# Altium PCB JacdacJoystick 44.PcbDoc
Units mm, origin at the board's own origin, x right, y up, seen from the top; angles counter-clockwise.
Board outline 24.99 x 32.7 mm, 2 copper layers (Top Layer, Bottom Layer), stack 1.525 mm thick; 22 components, 12 nets, 80 pads, 12 vias.
Unrouted connection lines stored in the file: 16.
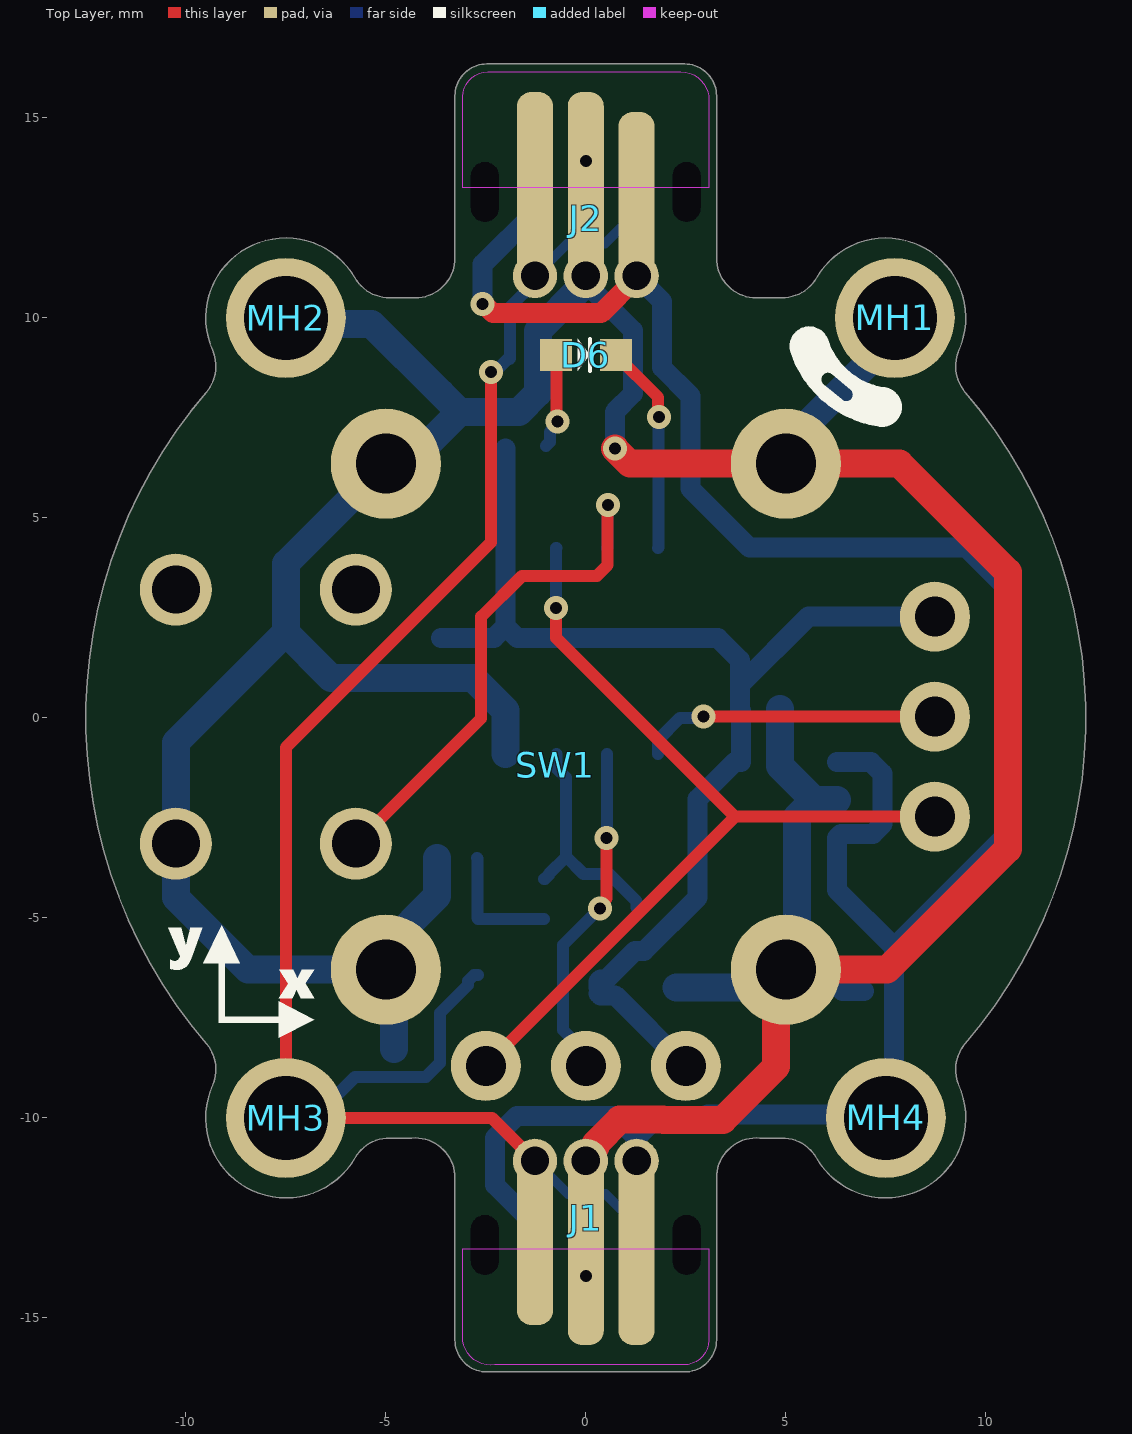
[diagram p0: Top Layer view]
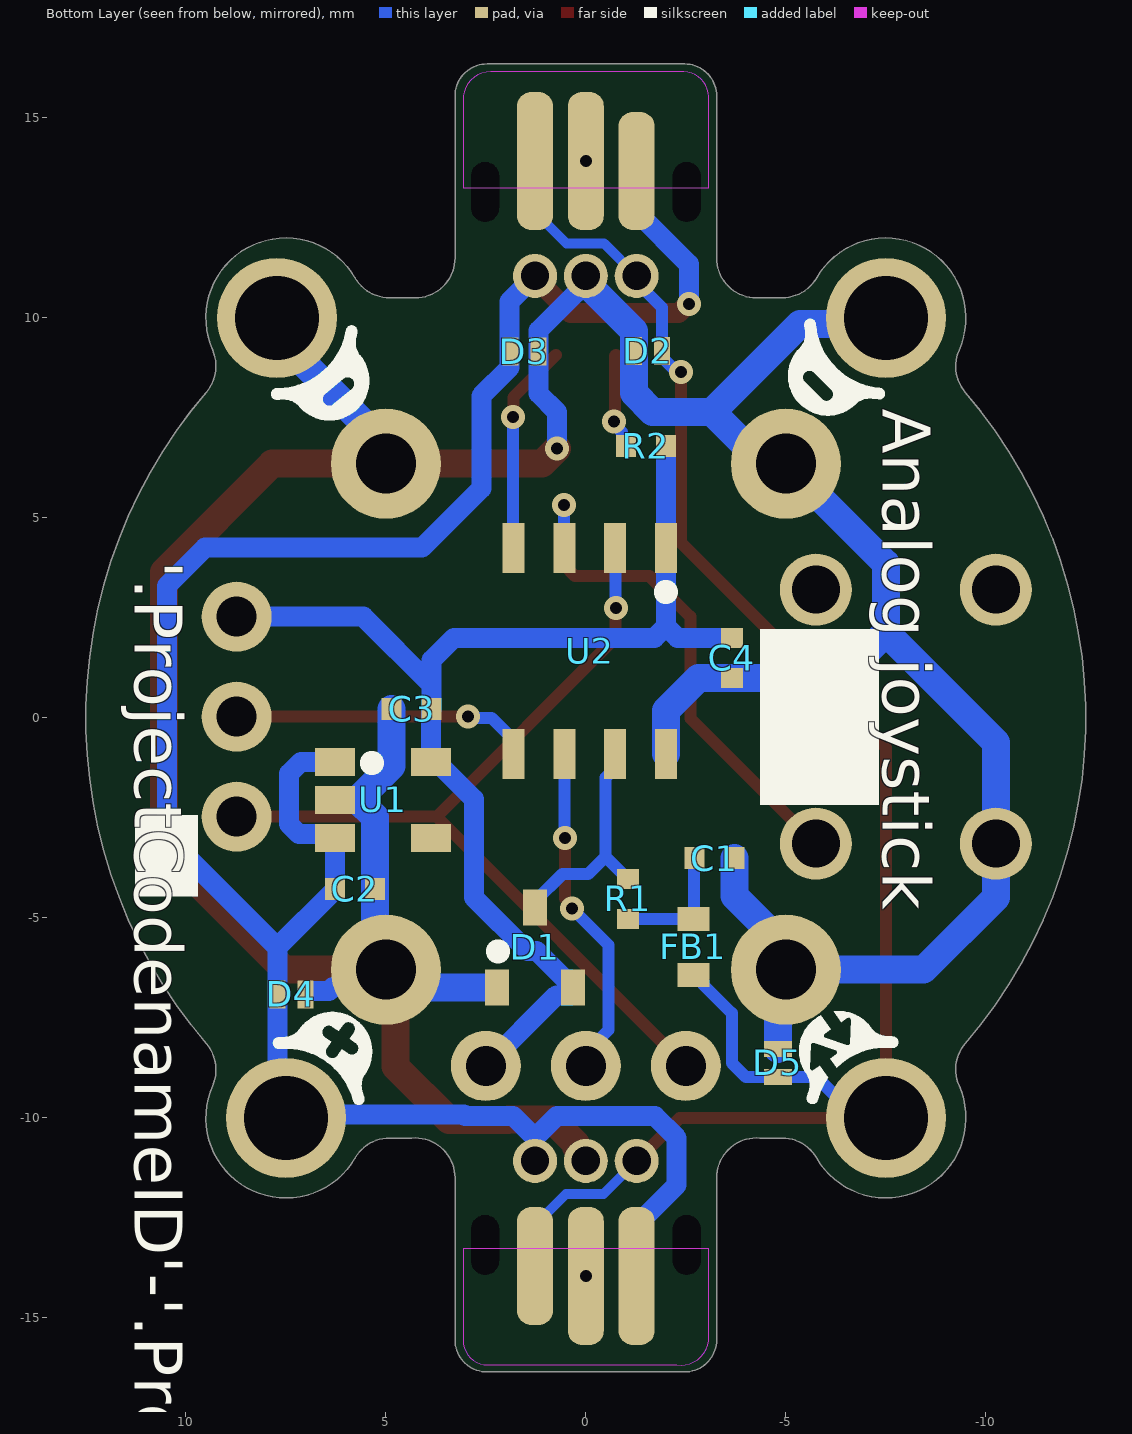
[diagram p1: Bottom Layer view, seen from below]
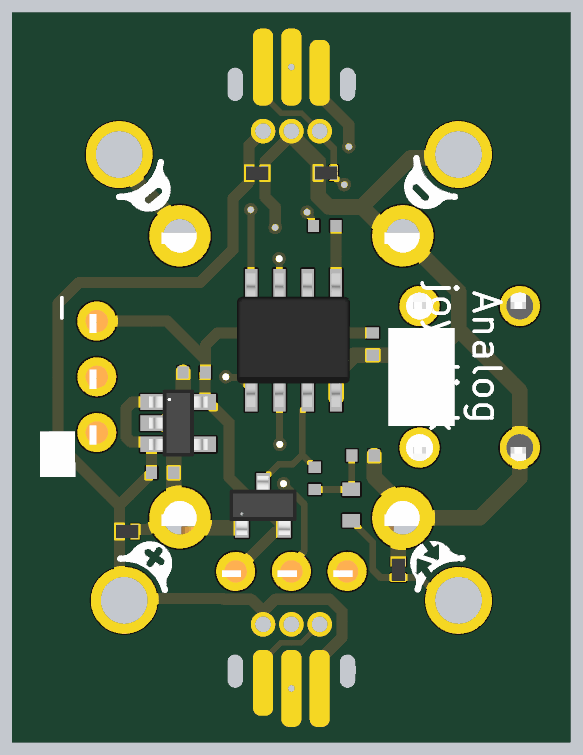
[diagram p2: 3D render of the assembled board from below, using the file's embedded part models]

## Layer stack, top to bottom
Top Solder: solder mask 0.0102, Solder Resist, Dk 3.5
Top Layer: signal copper 0.0356
Dielectric 1: core 1.454, FR-4, Dk 4.2
Bottom Layer: signal copper 0.0356
Bottom Solder: solder mask 0.0102, Solder Resist, Dk 3.5

## Board outline
-9.331,-9.193 ccw(c-7.501,-10) -5.77,-11.002 cw(c-4.905,-11.503) -4.905,-10.503 -4.35,-10.503 cw(c-4.27,-11.5) -3.27,-11.5 -3.27,-15.55 ccw(c-2.471,-15.551) -2.47,-16.35 2.47,-16.35 ccw(c2.471,-15.551) 3.27,-15.55 3.27,-11.5 cw(c4.27,-11.5) 4.35,-10.503 4.904,-10.503 cw(c4.904,-11.503) 5.769,-11.002 ccw(c7.5,-10) 9.331,-9.194 cw(c10.246,-8.791) 9.487,-8.14 ccw(c0.001,0) 9.487,8.14 cw(c10.246,8.792) 9.331,9.194 ccw(c7.5,10) 5.769,11.002 cw(c4.904,11.503) 4.904,10.503 4.35,10.503 cw(c4.27,11.5) 3.27,11.5 3.27,15.55 ccw(c2.471,15.551) 2.47,16.35 -2.47,16.35 ccw(c-2.471,15.551) -3.27,15.55 -3.27,11.5 cw(c-4.27,11.5) -4.35,10.503 -4.904,10.503 cw(c-4.904,11.503) -5.769,11.002 ccw(c-7.5,10) -9.33,9.194 cw(c-10.245,8.79) -9.486,8.139 ccw(c0.001,0) -9.487,-8.138 cw(c-10.246,-8.789)

## Design rules (kind name [scope] priority, off if disabled: settings)
AssemblyTestPointUsage [All] p1: valid=2
BoardOutlineClearance [All] p1: gap=0.3 ignorepadtopadclearanceinfootprint=FALSE except(0: Arc-SplitContinuation Track-SplitContinuation SMDPad-SplitContinuation THPad-SplitContinuation Via-SplitContinuation Fill-SplitContinuation Poly-SplitContinuation Region-OutlineEdge Region-SplitContinuation Text-OutlineEdge Text-SplitContinuation; 0.25: THPad-OutlineEdge Poly-OutlineEdge)
Clearance [All] p1: gap=0.125 ignorepadtopadclearanceinfootprint=FALSE except(0: Arc-Hole Track-Hole SMDPad-Hole THPad-Hole Via-Hole Fill-Hole Poly-Hole Region-Hole Text-Hole; 0.2: Arc-Arc Arc-Track Arc-Via Arc-Fill Arc-Poly Arc-Region Arc-Text Track-Track Track-Via Track-Fill Track-Poly Track-Region Track-Text)
ComponentClearance SpecialComponentClearance [InComponent('MH1') or InComponent('MH2')  or InComponent('MH3')  or InComponent('MH4') vs InComponent('J3') or InComponent('J4')  or InComponent('J6')  or InComponent('J7') or InComponent('J2') or InComponent('MH2') or InComponent('J1')] p1: gap=0 collisioncheckmode=3 verticalgap=0 showdistances=FALSE
ComponentClearance [All] p2: gap=0.2 collisioncheckmode=3 verticalgap=0.2 showdistances=FALSE
DiffPairsRouting [All] p1: maxlimit=2 minlimit=0.15 mostfreqgap=0.15 toplayer_minwidth=0.15 toplayer_maxwidth=2 toplayer_prefwidth=0.15 bottomlayer_minwidth=0.15 bottomlayer_maxwidth=2 bottomlayer_prefwidth=0.15 substack1={CB9D278B-8BF5-444A-AAF4-837A2A9DF42D} toplayer_{cb9d278b-8bf5-444a-aaf4-837a2a9df42d}_minwidth=0.381 toplayer_{cb9d278b-8bf5-444a-aaf4-837a2a9df42d}_maxwidth=0.381 toplayer_{cb9d278b-8bf5-444a-aaf4-837a2a9df42d}_prefwidth=0.381 bottomlayer_{cb9d278b-8bf5-444a-aaf4-837a2a9df42d}_minwidth=0.381 bottomlayer_{cb9d278b-8bf5-444a-aaf4-837a2a9df42d}_maxwidth=0.381 bottomlayer_{cb9d278b-8bf5-444a-aaf4-837a2a9df42d}_prefwidth=0.381 substack2={826B8647-A721-4255-895A-19F9591B9CD1} toplayer_{826b8647-a721-4255-895a-19f9591b9cd1}_minwidth=0.381 toplayer_{826b8647-a721-4255-895a-19f9591b9cd1}_maxwidth=0.381 toplayer_{826b8647-a721-4255-895a-19f9591b9cd1}_prefwidth=0.381 bottomlayer_{826b8647-a721-4255-895a-19f9591b9cd1}_minwidth=0.381 bottomlayer_{826b8647-a721-4255-895a-19f9591b9cd1}_maxwidth=0.381 bottomlayer_{826b8647-a721-4255-895a-19f9591b9cd1}_prefwidth=0.381 substack3={E64FCAF4-1BC8-437D-B1E0-0E5F2DC0F59E} toplayer_{e64fcaf4-1bc8-437d-b1e0-0e5f2dc0f59e}_minwidth=0.381 toplayer_{e64fcaf4-1bc8-437d-b1e0-0e5f2dc0f59e}_maxwidth=0.381 toplayer_{e64fcaf4-1bc8-437d-b1e0-0e5f2dc0f59e}_prefwidth=0.381 bottomlayer_{e64fcaf4-1bc8-437d-b1e0-0e5f2dc0f59e}_minwidth=0.381 bottomlayer_{e64fcaf4-1bc8-437d-b1e0-0e5f2dc0f59e}_maxwidth=0.381 bottomlayer_{e64fcaf4-1bc8-437d-b1e0-0e5f2dc0f59e}_prefwidth=0.381 substack4={E61CE66C-507C-4E1E-8E83-C905434AFC1C} toplayer_{e61ce66c-507c-4e1e-8e83-c905434afc1c}_minwidth=0.381 toplayer_{e61ce66c-507c-4e1e-8e83-c905434afc1c}_maxwidth=0.381 toplayer_{e61ce66c-507c-4e1e-8e83-c905434afc1c}_prefwidth=0.381 bottomlayer_{e61ce66c-507c-4e1e-8e83-c905434afc1c}_minwidth=0.381 bottomlayer_{e61ce66c-507c-4e1e-8e83-c905434afc1c}_maxwidth=0.381 bottomlayer_{e61ce66c-507c-4e1e-8e83-c905434afc1c}_prefwidth=0.381 maxuncoupledlength=25
FabricationTestPointUsage [All] p1: valid=2 allowmultiple=FALSE
HoleSize [All] p1: absolutevalues=TRUE maxlimit=2.54 minlimit=0.2 maxpercent=80.000 minpercent=20.000
MinimumSolderMaskSliver [All] p1: minsoldermaskwidth=0.005
PlaneClearance [All] p1: clearance=0.3
PlaneConnect [All] p1: planeconnectstyle=Relief reliefexpansion=0.5 reliefentries=4 reliefconductorwidth=0.2 reliefairgap=0.3
PolygonConnect "PolygonConnect GND" [isVIA] p1: connectstyle=Relief reliefconductorwidth=0.2 reliefentries=4 polygonreliefangle="90 Angle" airgapwidth=0.2
PolygonConnect [All] p2: connectstyle=Relief reliefconductorwidth=0.2 reliefentries=4 polygonreliefangle="90 Angle" airgapwidth=0.2
RoutingVias [All] p1: holewidth=0.3 width=0.6 viastyle="Through Hole" minholewidth=0.3 minwidth=0.6 maxholewidth=0.3 maxwidth=0.8
SilkToSilkClearance [All] p1: silktosilkclearance=0.001
SilkToSolderMaskClearance [IsPad] p1: minsilkscreentomaskgap=0.05 clearancetoexposedcopper=TRUE
SolderMaskExpansion [All] p1: expansion=0.075 istentingtop=FALSE
Width [All] p1: maxlimit=2 minlimit=0.15 preferedwidth=0.15 substack1={CB9D278B-8BF5-444A-AAF4-837A2A9DF42D} substack2={826B8647-A721-4255-895A-19F9591B9CD1} substack3={E64FCAF4-1BC8-437D-B1E0-0E5F2DC0F59E} substack4={E61CE66C-507C-4E1E-8E83-C905434AFC1C} minimp=50.000000 maximp=50.000000 favimp=50.000000
20 further rules are at their usual default settings.

## Components (designator, comment, footprint, x,y, rotation, side; value= is the part's Value field where it differs from the comment)
C1 "CL05C330JB5NNNC" "C0402_0.55MM - without outline" -3.216,-3.503 r0 bottom
C2 "CL05A105KP5NNNC" "C0402_0.55MM - without outline" 5.775,-4.275 r0 bottom
C3 "CL05A105KP5NNNC" "C0402_0.55MM - without outline" 4.356,0.226 r180 bottom
C4 "CL05A105KP5NNNC" "C0402_0.55MM - without outline" -3.65,1.5 r90 bottom
D1 "BAT54S" "NXP-BAT54S-TO-236AB - WITHOUT OUTLINE" 1.27,-5.736 r90 bottom
D2 "RCLAMP0521P-N" "TVS 0402 - L" -1.55,9.175 r0 bottom
D3 "RCLAMP0521P-N" "TVS 0402 - L" 1.534,9.164 r180 bottom
D4 "RCLAMP0521P-N" "TVS 0402 - L" 7.361,-6.911 r180 bottom
D5 "RCLAMP0521P-N" "TVS 0402 - L" -4.8,-8.625 r90 bottom
D6 "Everlight Elec'''" "0603 Orange" 0,9.075 r180 top
FB1 "TDK MPZ1608S102ATA00" "TDK MPZ1608 0.8MM - WITHOUT OUTLINE" -2.689,-5.721 r90 bottom
J1 "3 pin JACDAC edge connector" JACDAC_EDGE_CONNECTOR_NO_TRACES 0,-10.525 r180 top
J2 "3 pin JACDAC edge connector" JACDAC_EDGE_CONNECTOR_NO_TRACES 0,10.5 r0 top
MH1 "MH_5.0MMK_3.0MMC_2.1MMD_PTH" MH_5.0MMK_3.0MMC_2.1MMD_PTH 7.725,10 r180 top
MH2 "MH_5.0MMK_3.0MMC_2.1MMD_PTH" MH_5.0MMK_3.0MMC_2.1MMD_PTH -7.5,10 r90 top
MH3 "MH_5.0MMK_3.0MMC_2.1MMD_PTH" MH_5.0MMK_3.0MMC_2.1MMD_PTH -7.5,-10 r180 top
MH4 "MH_5.0MMK_3.0MMC_2.1MMD_PTH" MH_5.0MMK_3.0MMC_2.1MMD_PTH 7.5,-10 r0 top
R1 "RC0402FR-07220RL" "R0402 - Without outline" -1.05,-4.525 r270 bottom
R2 "RC0402FR-071KL" "R0402 - Without outline" -1.5,6.8 r180 bottom
SW1 "THB001P" THB001P 0,0.03 r270 top
U1 "ME6211C33M5G-N" MICRONE-SOT23-5 5.075,-2.05 r180 bottom
U2 "PMS171B-S08" SOP-8 -0.1,1.675 r270 bottom

## Footprints (in the part's own frame and the unit in brackets; to place one, negate y for a bottom-side part, rotate by r counter-clockwise, add the part's x,y. Pads: shape width x height; smd on the part's side, far side on the other; paste and mask are expansions set on the pad)
"0603 Orange" [mm]
  rect 0.8x0.8 smd paste-0.05: 1(-0.75,0) 2(0.75,0)
  silkscreen extent -0.1,-0.4 0.2,0.4, body extent -0.79,-0.4 0.81,0.4, height 0.4
"C0402_0.55MM - without outline" [mm]
  rect 0.5x0.55 smd: 1(-0.5,0) 2(0.5,0)
  body extent -0.5,-0.25 0.5,0.25, height 0.55
JACDAC_EDGE_CONNECTOR_NO_TRACES [mm] "JacDac 3 pin connector with no traces"
  rrect78% 0.9x2.95 smd far side paste-1 mask+0: 1(-1.27,3.175)
  rrect78% 0.9x4.3 smd paste-1 mask+0: 1(1.27,2.5)
  round 1.11 / inner round 0.71 / far side round 1.1 hole 0.71 paste-0.254 mask+0: 1(1.27,0.55) 2(0,0.55) 3(-1.27,0.55)
  rrect78% 0.9x3.45 smd far side paste-1 mask+0: 2(0,3.425) 3(1.27,3.425)
  rrect78% 0.9x4.8 smd paste-1 mask+0: 2(0,2.75) 3(-1.27,2.75)
  round 0 hole 0.7 slot 1.5 at 90 deg unplated: ""(-2.52,2.65) ""(2.52,2.65)
  Top Layer keep-out region: -3.075,2.75 -3.07,5.033 -2.987,5.341 -2.761,5.567 -2.453,5.65 -2.453,5.65 2.27,5.65 2.545,5.635 2.794,5.516 2.978,5.31 3.07,5.05 3.07,5.05 3.07,2.75
  Bottom Layer lines w0.2: -1.126,0.85 -1.27,0.85
  Bottom Layer keep-out region: -3.07,2.75 -3.07,5.033 -3.023,5.269 -2.889,5.469 -2.689,5.603 -2.453,5.65 -2.453,5.65 2.27,5.65 2.545,5.635 2.794,5.516 2.978,5.31 3.07,5.05 3.07,5.05 3.07,2.75
MH_5.0MMK_3.0MMC_2.1MMD_PTH [mm] "Mounting Hole 5.0mm clearance, 3.1 annualar ring and 2.1mm PTH"
  round 3 hole 2.1 mask+0.05: 1(0,0)
MICRONE-SOT23-5 [mm]
  rect 1x0.7 smd: 1(-1.2,0.95) 2(-1.2,0) 3(-1.2,-0.95) 4(1.2,-0.95) 5(1.2,0.95)
  silkscreen extent -0.33,0.88 -0.23,0.97, body extent -1.32,-1.5 1.32,1.5, height 1.11
"NXP-BAT54S-TO-236AB - WITHOUT OUTLINE" [mm] "SOT23, 3-Leads, Body 2.90x2.30mm, Pitch 0.95mm, IPC Medium Density"
  rect 0.9x0.6 smd: 1(-1,0.95) 2(-1,-0.95) 3(1,0)
  silkscreen extent -0.15,0.88 -0.05,0.97, body extent -1.32,-1.5 1.32,1.5, height 1.12
"R0402 - Without outline" [mm]
  rect 0.5x0.55 smd: 1(-0.5,0) 2(0.5,0)
  body extent -0.5,-0.25 0.5,0.25, height 0.35
SOP-8 [mm] "Pitch:1.27mm,Width:150mil"
  rect 1.25x0.55 smd: 1(-2.575,1.905) 2(-2.575,0.635) 3(-2.575,-0.635) 4(-2.575,-1.905) 5(2.575,-1.905) 6(2.575,-0.635) 7(2.575,0.635) 8(2.575,1.905)
  silkscreen extent -1.52,1.85 -1.43,1.95, body extent -3,-2.55 3,2.54, height 1.3
"TDK MPZ1608 0.8MM - WITHOUT OUTLINE" [mm]
  rect 0.6x0.8 smd: 1(-0.7,0) 2(0.7,0)
  body extent -0.8,-0.4 0.8,0.4, height 0.8
THB001P [mm] "Plugin Multi-Directional Switches"
  round 1.75 hole 1: 1(8.73,-2.5) 2(8.73,0) 3(8.73,2.5) 4(2.5,8.73) 5(0,8.73) 6(-2.5,8.73)
  round 1.8 hole 1.2: 7(-3.175,-5.75) 8(-3.175,-10.25) 9(3.175,-5.75) 10(3.175,-10.25)
  round 2.75 hole 1.5: 11(-6.325,5) 11(-6.325,-5) 11(6.325,5) 11(6.325,-5)
  body extent -6.47,-11.43 9.92,10.03, height 17.3
"TVS 0402 - L" [mm] "TVS 0402 RoHS"
  rect 0.4x0.7 smd paste-0.038 mask+0.05: 1(-0.35,0) 2(0.35,0)
  body extent -0.5,-0.3 0.5,0.3, height 0.5

## Part data
C1: "CAP CER 33PF 50V C0G/NP0 0402", Capacitance=33pF, Case Code (Imperial)=0402, Case Code (Metric)=1005, Dielectric=C0G, Manufacturer=Samsung, Max Operating Temperature=125°C, Min Operating Temperature=-55°C, Package Quantity=1, Supplier Part Number 1=1276-1272-1-ND, Temperature Coefficient=300ppm/°C, Tolerance=5%, Voltage=50V, Case/Package=0402, Category="Ceramic Capacitors", ComponentLink1Description="Online datasheet", ComponentLink1URL=https://datasheet.ciiva.com/15195/getdatasheetpartid-355282-15195687.pdf, Construction=Flat, Contact Plating=Tin, Depth=0.5mm, Height=0.5mm, Lead Free="Lead Free", Length=1mm, Manufacturer Part Number=CL05C330JB5NNNC, Material=Ceramic, Mount="Surface Mount", Packaging="Tape and Reel", Pricing 1="1=0.10000, 10=0.02300, 50=0.01260, 100=0.01040, 500=0.00740, 1000=0.00582, 2500=0.00529, 5000=0.00487 (USD)", Pricing 2="1=0.12500, 25=0.02900, 100=0.01300, 250=0.01100, 500=0.00900, 1000=0.00600 (USD)", Pricing 3="1=0.10000, 10=0.01400, 50=0.01400, 100=0.01100, 1000=0.00600, 10000=0.00400 (USD)", Pricing 4="150=0.01120, 500=0.00860, 2500=0.00640, 5000=0.00550 (GBP)", Radiation Hardening=No, RoHS=Yes, RoHS Compliant=Yes, Series=CL, Stock 1=5436088, Stock 2=45340, Stock 3=8877, Stock 4=10934, Supplier 1=Digi-Key, Supplier 2=Newark, Supplier 3=Mouser, Supplier 4=Farnell, Supplier Part Number 2=82AC9259, Supplier Part Number 3=187-CL05C330JB5NNNC, Supplier Part Number 4=3013373RL, Thickness=0.022inch, Voltage Rating=50V, Voltage Rating (DC)=50V, Width=0.02inch
C2 C3 C4: "CAP CER 1UF 10V X5R 0402", Capacitance=1µF, Case Code (Imperial)=0402, Case Code (Metric)=1005, Dielectric=X5R, Manufacturer=Samsung, Max Operating Temperature=85°C, Min Operating Temperature=-55°C, Package Quantity=1, Supplier Part Number 1=1276-1076-1-ND, Tolerance=10%, Voltage Rating=10V, Case/Package=0402, Category=Capacitors, Checked=?, ComponentLink1Description="Online datasheet", ComponentLink1URL=https://datasheet.ciiva.com/15195/getdatasheetpartid-358390-15195630.pdf, Contact Plating=Tin, Created=DG, Depth=0.5mm, Height=0.5mm, Length=1mm, Manufacturer Part Number=CL05A105KP5NNNC, Material=Ceramic, Mount="Surface Mount", Packaging="Tape and Reel", Pricing 1="1=0.10000, 10=0.03900, 50=0.02100, 100=0.01720, 500=0.01228, 1000=0.00965, 2500=0.00877, 5000=0.00807 (USD)", Pricing 2="1=0.10000, 10=0.04200, 100=0.01800, 500=0.01300, 1000=0.01000, 2500=0.00900 (USD)", Pricing 3="10=0.02450, 100=0.02000, 500=0.01310, 2500=0.00920, 5000=0.00810, 10000=0.00640, 50000=0.00490 (GBP)", Radiation Hardening=No, RoHS=Yes, Stock 1=5705569, Stock 2=928941, Stock 3=53670, Supplier 1=Digi-Key, Supplier 2=Mouser, Supplier 3=Farnell, Supplier Part Number 2=187-CL05A105KP5NNNC, Supplier Part Number 3=3013329, Thickness=0.022inch, Width=0.02inch
D1: "DIODE ARRAY SCHOTTKY 30V SOT23", Manufacturer=Nexperia, Manufacturer Part Number=BAT54S,235, Supplier Part Number 1=1727-1868-1-ND, Category="Rectifier Diodes", ComponentLink1Description="NXP datasheet online", ComponentLink1URL=https://assets.nexperia.com/documents/data-sheet/BAT54_SER.pdf, Pricing 1="1=0.13000, 10=0.11900, 100=0.05610, 500=0.03326, 1000=0.02185, 5000=0.02138 (USD)", RoHS=No, Stock 1=14011, Supplier 1=Digi-Key, Supplier 2=Mouser, Supplier 3=RSComponents, Supplier Part Number 2=771-BAT54S235, Supplier Part Number 3=1707990
D2 D3 D4 D5: "Bidirectional 5V (Max) 6V 16V 3.5A (8/20us) 0402 TVS RoHS", Manufacturer="Born Semiconductor", Package=0402, Supplier1 Part Number=C316043, Checked By=?, ComponentLink1Description="Online datasheet", ComponentLink1URL=https://datasheet.lcsc.com/szlcsc/Bourne-Semicon-Shenzhen-RCLAMP0521P-N_C316043.pdf, Created By="D Gakure", Manufacturer Part Number=RCLAMP0521P-N, Supplier1=LCSC
D6: library part 19-217/S2C-AQ1R1B/3T, "LED ORANGE DIFFUSED 0603 SMD", Case Code (Imperial)=0603, Color=Orange, Manufacturer="Everlight Elec", Supplier 1 Part Number=C146215, Case/Package=0603, Colour=Orange, ComponentLink1Description="Online datasheet", ComponentLink1URL=https://datasheet.lcsc.com/lcsc/1912171731_Everlight-Elec-19-217-S2C-AQ1R1B-3T_C146215.pdf, Manufacturer Part Number=19-217/S2C-AQ1R1B/3T, Mount="Surface Mount", Supplier 1=LCSC
FB1: "0603 1k@100MHz 0.8A chip", Case Code (Imperial)=0603, Case Code (Metric)=1608, Current Rating=800mA, DC Resistance (DCR)=300mR, Manufacturer=TDK, Manufacturer Part Number=MPZ1608S102ATA00, Package Quantity=4000, Supplier Part Number 1=445-8694-1-ND, Tolerance=25%, Case/Package=0603, ComponentLink2Description="datasheet online", ComponentLink2URL=https://www.mouser.co.uk/datasheet/2/400/eads_commercial_power_mpz1608_en-923650.pdf, ComponentLink3Description=datasheet, ComponentLink3URL="Y:\System\Altium\Libraries 2014\TDK\Datasheets\eads_commercial_power_mpz1608_en-923650.pdf", Core Material=Ferrite, Height=0.037inch, Impedance="1kR @ 100MHz", Length=0.063inch, Max DC Current=800mA, Mount="Surface Mount", Packaging="Tape and Reel", Pricing 1="1=0.1, 10=0.079, 25=0.0716, 50=0.0644, 100=0.0472, 250=0.03432, 500=0.03146, 1000=0.02717 (USD)", Stock 1=113542, Supplier 1=Digi-Key, Supplier 2=Mouser, Supplier Part Number 2=810-MPZ1608S102ATA00, Width=0.031inch
J1 J2: library part "Jacdac edge connector", "3 pin Jacdac edge connector 1.27mm pitch", Manufacturer Part Number=JACDAC_EDGE_CONNECTOR, Checked By=?, ComponentLink1Description="Yuliang JACDAC cable connector drawing online", ComponentLink1URL=https://github.com/microsoft/jacdac-mdk/blob/main/connector/JACDAC-Connector-by-Yuliang-2020-11-28.pdf, ComponentLink2Description="JACDAC PCB edge connector spec onlin", ComponentLink2URL=https://github.com/microsoft/jacdac-mdk/blob/main/connector/JACDAC_PCB_Edge_Connector_Drawing_JD-PEC-01_rev_01.pdf, Created By="D. Gakure", PCB Type="1.6mm FR4"
MH1 MH2 MH3 MH4: "Mounting Hole 5.0mm keepout, 3.0mm annualar ring and 2.1mm Drill PTH"
R1: "RES SMD 220 OHM 1% 1/16W 0402", Case Code (Imperial)=0402, Case Code (Metric)=1005, Manufacturer=Yageo, Max Operating Temperature=155°C, Max Power Dissipation=63mW, Min Operating Temperature=-55°C, Package Quantity=1, Power Rating=62.5mW, Resistance=220R, Resistor Type="Thick Film", Supplier Part Number 1=311-220LRCT-ND, Temperature Coefficient=100ppm/°C, Tolerance=1%, Voltage Rating=50V, Case/Package=0402, Category=Resistors, Checked=?, ComponentLink1Description=https://datasheet.ciiva.com/11819/0900766b80c66297-11819466.pdf?src-supplier=RSComponents, ComponentLink1URL=https://datasheet.ciiva.com/11819/0900766b80c66297-11819466.pdf?src-supplier=RSComponents, ComponentLink2Description=https://datasheet.ciiva.com/2453/pyu-r-int-thick-7-2453460.pdf?src-supplier=Digi-Key, ComponentLink2URL=https://datasheet.ciiva.com/2453/pyu-r-int-thick-7-2453460.pdf?src-supplier=Digi-Key, ComponentLink3Description=https://datasheet.ciiva.com/2453/pyu-r-int-thick-7-2453461.pdf?src-supplier=Digi-Key, ComponentLink3URL=https://datasheet.ciiva.com/2453/pyu-r-int-thick-7-2453461.pdf?src-supplier=Digi-Key, ComponentLink4Description=https://datasheet.ciiva.com/2453/pyu-r-int-thick-7-2453462.pdf?src-supplier=Digi-Key, ComponentLink4URL=https://datasheet.ciiva.com/2453/pyu-r-int-thick-7-2453462.pdf?src-supplier=Digi-Key, ComponentLink5Description=https://datasheet.ciiva.com/16746/pyu-rc0402-51-rohs-l-6-r-16746831.pdf?src-supplier=Future+Electronics, ComponentLink5URL=https://datasheet.ciiva.com/16746/pyu-rc0402-51-rohs-l-6-r-16746831.pdf?src-supplier=Future+Electronics, Created=D.G, Depth=0.5mm, Features="Moisture Resistant", Height=0.016inch, Lead Free="Lead Free", Length=1mm, Manufacturer Part Number=RC0402FR-07220RL, Military Standard=Not, Number of Pins=2, Number of Terminations=2, Packaging="Tape and Reel", Pricing 1="1=0.10000, 10=0.01400, 100=0.00580, 1000=0.00262, 2500=0.00228, 5000=0.00188 (USD)", Pricing 2="1=0.10000, 10=0.01200, 100=0.00400, 1000=0.00400, 2500=0.00400, 10000=0.00300 (USD)", Pricing 3="1=0.08130, 25=0.01210, 100=0.01120, 250=0.01030, 500=0.00900 (GBP)", REACH SVHC="No SVHC", RoHS=Yes, Stock 1=1286042, Stock 2=324625, Stock 3=18234, Supplier 1=Digi-Key, Supplier 2=Mouser, Supplier 3=Farnell, Supplier Part Number 2=603-RC0402FR-07220RL, Supplier Part Number 3=2147864, Termination=SMD/SMT, Voltage Rating (DC)=50V, Width=0.02inch
R2: "RES SMD 1K OHM 1% 1/16W 0402", Case Code (Imperial)=0402, Case Code (Metric)=1005, Manufacturer=Yageo, Max Operating Temperature=155°C, Min Operating Temperature=-55°C, Power Rating=62.5mW, Resistance=1kR, Resistor Type="Thick Film", Supplier Part Number 1=311-1.00KLRDKR-ND, Temperature Coefficient=100ppm/°C, Tolerance=1%, Voltage Rating=50V, Case/Package=0402, Category=Resistors, Checked=?, ComponentLink2Description="Online datasheet", ComponentLink2URL=https://datasheet.ciiva.com/12666/pyu-rc0402-51-rohs-l-6-r-12666741.pdf, Created=D.G, Depth=0.5mm, Height=0.32mm, Lead Free="Lead Free", Length=1mm, Manufacturer Part Number=RC0402FR-071KL, Military Standard=Not, Number of Pins=2, Packaging="Tape and Reel", Pricing 1="1=0.10000, 10=0.01400, 100=0.00580, 1000=0.00262, 2500=0.00228, 5000=0.00188 (USD)", Pricing 2="1=0.10000, 10=0.01200, 100=0.00400, 1000=0.00400, 2500=0.00400, 10000=0.00300 (USD)", Pricing 3="1=0.08130, 25=0.01210, 100=0.01120, 250=0.01030, 500=0.00900 (GBP)", REACH SVHC=Unknown, RoHS=Yes, Stock 1=37591306, Stock 2=11912978, Stock 3=29900, Supplier 1=Digi-Key, Supplier 2=Mouser, Supplier 3=Farnell, Supplier Part Number 2=603-RC0402FR-071KL, Supplier Part Number 3=2132441, Termination=SMD/SMT, Voltage Rating (DC)=50V, Width=0.5mm
SW1: "Joystick, 2 - Axis Analog (Resistive) Output", Manufacturer="ITT C&K", Supplier Part Number 1=108-THB001P-ND, Manufacturer Part Number=THB001P, Pricing 1="1=1.99000, 5=1.94600, 10=1.63700, 25=1.54840, 50=1.45980, 100=1.32710 (USD)", Pricing 2="1=1.42000, 10=1.31000, 25=1.31000, 50=1.31000, 100=1.22000, 250=1.22000 (USD)", Pricing 3="1=1.70000, 10=1.42000, 50=1.27000, 100=1.16000, 1000=1.12000, 10000=1.12000 (USD)", Pricing 4="1=1.50000, 10=1.26000, 25=1.19000, 50=1.12000, 100=1.01000, 250=0.99300 (GBP)", RoHS=No, Stock 1=4242, Stock 2=9015, Stock 3=4075, Stock 4=9034, Supplier 1=Digi-Key, Supplier 2=Newark, Supplier 3=Mouser, Supplier 4=Farnell, Supplier Part Number 2=66AH3097, Supplier Part Number 3=611-THB001P, Supplier Part Number 4=3463017
U1: "6V 260mV @ 200mA(typ) - - Fixed 3.3V SOT-23-5 Linear Voltage Regulators (LDO) ROHS", Case/Package=SOT-23-5, Dropout Voltage=200mV, Manufacturer="MICRONE(Nanjing Micro One Elec)", Max Input Voltage=6, Min Output Voltage=3.3V, Output Current=500mA, Supplier Part Number=C82942, Category="Voltage Regulators - Linear", Checked=?, ComponentLink3Description="On Semi datasheet online", ComponentLink3URL=https://datasheet.lcsc.com/lcsc/1811131510_MICRONE-Nanjing-Micro-One-Elec-ME6211C33M5G-N_C82942.pdf, Created=DG, Manufacturer Part Number=ME6211C33M5G-N, Mount="Surface Mount", Number of Regulators=1, Output Configuration=Positive, Output Type=Fixed, Pricing 1="1=0.33000, 10=0.24900, 25=0.21760, 100=0.12440, 250=0.11664, 500=0.09330, 1000=0.07153 (USD)", Stock 1=32529, Supplier 1=LCSC
U2: "8bit OTP MCU with 8-bit ADC", Manufacturer=PADAUK, Package=SOP-16, Supplier Part Number 1=C337967, ComponentLink1Description="Online datasheet", ComponentLink1URL=http://www.padauk.com.tw/upload/doc/PMS171B_datasheet_EN_v103_20200902-1.pdf, Manufacturer Part Number=PMS171B-S08, Pricing 1="5=0.0949, 50=0.0714, 150=0.0671", Stock 1=0, Supplier 1=LCSC, Supplier Order Qty 1=3000

## Via types
v1: diameter 0.6, hole 0.3, Top Layer to Bottom Layer, tented both sides, 12 vias

## Nets (pads, with @x,y where several pads share a name; then routed paths per layer and width w, separated by ;. In a path a pad name is that pad's centre, name@x,y a point inside that pad or via, vN(x,y) a via of type N, cw(c..) or ccw(c..) an arc to the next point about the centre after c; other vN are vias at no path point)
3V3: C3.2 C4.2 D1.2 R2.2 SW1.3 SW1.6 U1.5 U2.1 | length 30.9
  Bottom Layer w0.5: C4.2@-3.625,2 -2.298,2 -2.005,2.293 ; R2.2@-2.005,6.73 -2.005,2.293 ; D1.2@0.32,-6.886 0.37,-6.936 0.736,-6.936 SW1.3 ; D1.2 0.32,-6.586 0.37,-6.536 0.52,-6.536 1.227,-5.829 1.457,-5.829 2.794,-4.492 2.794,-2.031 3.725,-1.1 U1.5 3.875,0.182 3.856,0.201 C3.2 3.856,0.822 ; SW1.6 5.563,2.53 3.856,0.822 ; -2.005,2.293 -1.712,2 3.3,2 3.856,1.444 3.856,0.822
BTN_SEL: SW1.9 U2.3 | length 13.2
  Top Layer w0.3: SW1.9 -2.613,-0.008 -2.613,2.53 -1.593,3.55 0.275,3.55 0.543,3.818 v1@0.543,5.318
  Bottom Layer w0.3: U2.3 0.542,4.257 0.542,5.317 v1(0.55,5.325)
GND: C1.1 C2.1 C3.1 C4.1 D1.1 D2.2 D3.2 D4.2 D5.2 J1.2 J2.2 MH1.1 MH2.1 SW1.10 SW1.11 U1.2 U2.8 | length 100.4
  Top Layer w0.7: J1.2@0,-11.075 0,-10.964 0.24,-10.724 0.24,-10.648 0.843,-10.045 1.936,-10.045 1.941,-10.05 3.425,-10.05 4.755,-8.72 4.755,-6.54 5,-6.295 7.53,-6.295 10.55,-3.275 10.55,3.65 7.845,6.355 5,6.355 1.1,6.355 v1(0.725,6.73)
  Bottom Layer w0.5: J1.2@0,-11.075 J1.2@0,-11.037 ; J2.2@0.245,10.625 1.184,9.687 D3.2 1.184,8.11 0.725,7.652 v1(0.725,6.73) ; SW1.11@5,-6.295 5.431,-6.726 6.321,-6.726 6.418,-6.823 D4.2@6.961,-6.823
  Bottom Layer w0.7: MH2.1 -7.353,9.853 -5.353,9.853 -3.625,8.125 -3.15,7.65 ; D5.2 -4.8,-6.495 SW1.11@-5,-6.295 ; C1.1 -3.716,-4.456 -5,-5.74 SW1.11@-5,-6.295 ; U2.8 -2.005,0.185 -2.82,1 -6.368,1 -7.5,2.132 ; J2.2@0,11.05 -0.077,10.973 -0.077,10.794 -1.2,9.67 D2.2 -1.2,8.122 -1.672,7.65 -3.15,7.65 ; D1.1@2.27,-6.735 4.005,-6.735 4.445,-6.295 5,-6.295 5.275,-6.02 C2.1 5.275,-2.478 5.703,-2.05 ; C3.1 4.856,-1.203 5.703,-2.05 ; SW1.11@5,6.355 5,6.815 7.725,9.54 MH1.1 ; U1.2 5.703,-2.05 ; -7.5,2.132 -7.5,3.855 -5,6.355 -4.445,6.355 -3.15,7.65 ; -7.5,2.132 -10.25,-0.618 SW1.10 -10.25,-4.492 -8.447,-6.295 SW1.11@-5,-6.295
  other v1: 0,-13.95 0,13.925
JD_DATA: D2.1 D5.1 FB1.1 J1.1 J2.3 MH3.1 | length 46.4
  Top Layer w0.3: v1(-2.375,8.65) -2.375,4.385 -7.5,-0.74 MH3.1 -2.345,-10 J1.1@-1.27,-11.075
  Bottom Layer w0.25: J1.1@-1.423,-10.922 -1.27,-11.075 -0.445,-11.9 0.495,-11.9 1.27,-12.675 J1.1@1.27,-13.7 ; J2.3@-1.27,11.05 -0.459,11.861 0.481,11.861 1.27,12.65 J2.3@1.27,13.925
  Bottom Layer w0.3: MH3.1 -6.792,-10 -5.767,-8.975 D5.1 -4,-8.975 -3.65,-8.625 -3.65,-7.382 -2.939,-6.671 -2.939,-6.571 -2.789,-6.421 FB1.1 ; v1(-2.375,8.65) -2.318,8.707 -2.218,8.707 -1.95,8.975 -1.907,8.975 -1.9,8.982 -1.9,10.266 -1.27,10.896 J2.3@-1.27,11.05
JD_DATA_MCU: D1.3 R1.1 U2.7 | length 5.8
  Bottom Layer w0.3: R1.1 -1.025,-4.025 -0.925,-3.925 -0.925,-3.9 -0.491,-3.466 ; U2.7 -0.735,-1.25 -0.491,-1.494 -0.491,-3.466 ; D1.3 1.27,-4.586 0.584,-3.9 -0.057,-3.9 -0.491,-3.466
JD_PWR: C2.2 D3.1 D4.1 J1.3 J2.1 MH4.1 U1.1 U1.3 | length 59.6
  Top Layer w0.5: v1(-2.575,10.35) -2.548,10.35 -2.318,10.12 0.385,10.12 1.27,11.005 J2.1@1.27,11.05
  Bottom Layer w0.5: v1@-2.575,10.375 -2.575,11.345 -1.27,12.65 J2.1@-1.27,13.675 ; J1.3@-1.27,-13.95 -1.27,-12.675 -2.27,-11.675 -2.27,-10.495 -1.725,-9.95 0.725,-9.95 1.27,-10.495 ; J1.3@1.27,-11.075 1.27,-10.495 ; J2.1@1.27,11.05 1.905,10.415 1.905,8.76 2.613,8.052 2.613,5.737 4.09,4.26 9.515,4.26 10.475,3.3 10.475,-2.972 7.711,-5.736 ; U1.1 7.126,-1.1 7.419,-1.393 7.419,-2.657 7.176,-2.9 6.375,-2.9 U1.3 C2.2 6.275,-4.3 7.711,-5.736 ; 1.27,-10.495 1.815,-9.95 3.018,-9.95 3.049,-9.919 7.419,-9.919 MH4.1 7.711,-9.789 D4.1 7.711,-5.736
JD_STATUS: D6.1 U2.4 | length 5.3
  Top Layer w0.3: D6.1 1.812,8.013 1.812,7.538 v1(1.825,7.525)
  Bottom Layer w0.3: U2.4 1.815,4.26 1.815,7.515 v1(1.825,7.525)
NetC1_2: C1.2 FB1.2 R1.2 | length 3.2
  Bottom Layer w0.3: C1.2 -2.702,-3.517 -2.702,-5.008 FB1.2 -2.687,-5.023 -1.052,-5.023 R1.2
NetD6_2: D6.2 R2.1 | length 2.4
  Top Layer w0.3: D6.2 -0.728,9.053 -0.728,7.436 v1(-0.706,7.414)
  Bottom Layer w0.3: R2.1 -0.9,6.9 -0.9,7.148 -0.706,7.342 v1(-0.706,7.414)
POT_SINK: SW1.1 SW1.4 U2.2 | length 22.4
  Top Layer w0.3: SW1.1 3.73,-2.47 ; v1(-0.75,2.75) -0.74,2.74 -0.74,2 3.73,-2.47 ; SW1.4 3.73,-2.47
  Bottom Layer w0.3: v1(-0.75,2.75) -0.743,2.758 -0.743,4.242 U2.2
X_WIPER: SW1.2 U2.6 | length 8.5
  Top Layer w0.3: v1(0.351,-4.766) 0.351,-4.685 0.52,-4.516 v1(0.52,-3)
  Bottom Layer w0.3: SW1.2 0,-8.372 -0.572,-7.799 -0.572,-5.678 0.34,-4.766 v1(0.351,-4.766) ; v1(0.52,-3) 0.535,-2.985 U2.6
Y_WIPER: SW1.5 U2.5 | length 7.5
  Top Layer w0.3: v1(2.943,0.03) SW1.5
  Bottom Layer w0.3: U2.5 1.805,-0.55 2.354,-0.001 2.912,-0.001 v1(2.943,0.03)
pads on no net: J1. J2. SW1.7 SW1.8 U1.4

## Silkscreen, mask and mechanical layers (free items; w line width, h text height)
Top Overlay:
  drawing of 4 lines, arcs and shapes, not listed
Bottom Overlay:
  drawing of 6 lines, arcs and shapes, not listed
  text "Analog joystick" at -7.425,7.728 h1.2 r90
  text "'.ProjectCodenameID'-'.ProjectRevision'" at 11.275,3.925 h1.2 r90
Bottom Solder:
  text "Bottom Solder (resist)" at 13.977,15.603 h1.7
Dimension:
  the board outline again, w0.05
Board Outline:
  the board outline again, w0.1
Top Assy:
  the board outline again, w0.05
Bottom Assy:
  the board outline again, w0.05

## Dimensions
-2.47,16.35 to 2.47,-16.35 on Dimension
-7.5,-10 to -7.5,10 on Dimension
-12.499,0 to 12.501,0 on Dimension
-3.27,-15.55 to 3.27,-15.55 on Dimension
-7.5,-10 to 7.5,-10 on Dimension

## Text inside footprints (layer, text, board x,y; h text height)
J1: Mechanical 9 "Jacdac / cable connector  / body" at 4.821,-20.533 h1.7 r180; Alignment "board outline  / for 'outie'" at -5.14,-11.389 h1.2 r180; Alignment "board outline  / for 'innie'" at -4.53,-8.544 h1.2 r180
J2: Mechanical 9 "Jacdac / cable connector  / body" at -4.821,20.508 h1.7; Alignment "board outline  / for 'outie'" at 5.14,11.364 h1.2; Alignment "board outline  / for 'innie'" at 4.53,8.519 h1.2
MH2: Assembly Notes "5mm dia keepout  / for traces and  / components to  / allow space for  / bushes/standoffs/ / nuts/screw heads" at -8.389,12.794 h0.5 r90; Assembly Notes "board outline can  / be on 2.0mm   / radius if necessary" at -3.944,12.794 h0.5 r90